# Altium PCB PCB.PcbDoc (part 2 of 3)
Units mm, origin at the board's own origin, x right, y up, seen from the top; angles counter-clockwise.
Board outline 145 x 65 mm, 4 copper layers (Top Layer, GND, VDD, Bottom Layer), stack 1.565 mm thick; 229 components, 167 nets, 739 pads, 265 vias.
Unrouted connection lines stored in the file: 1.
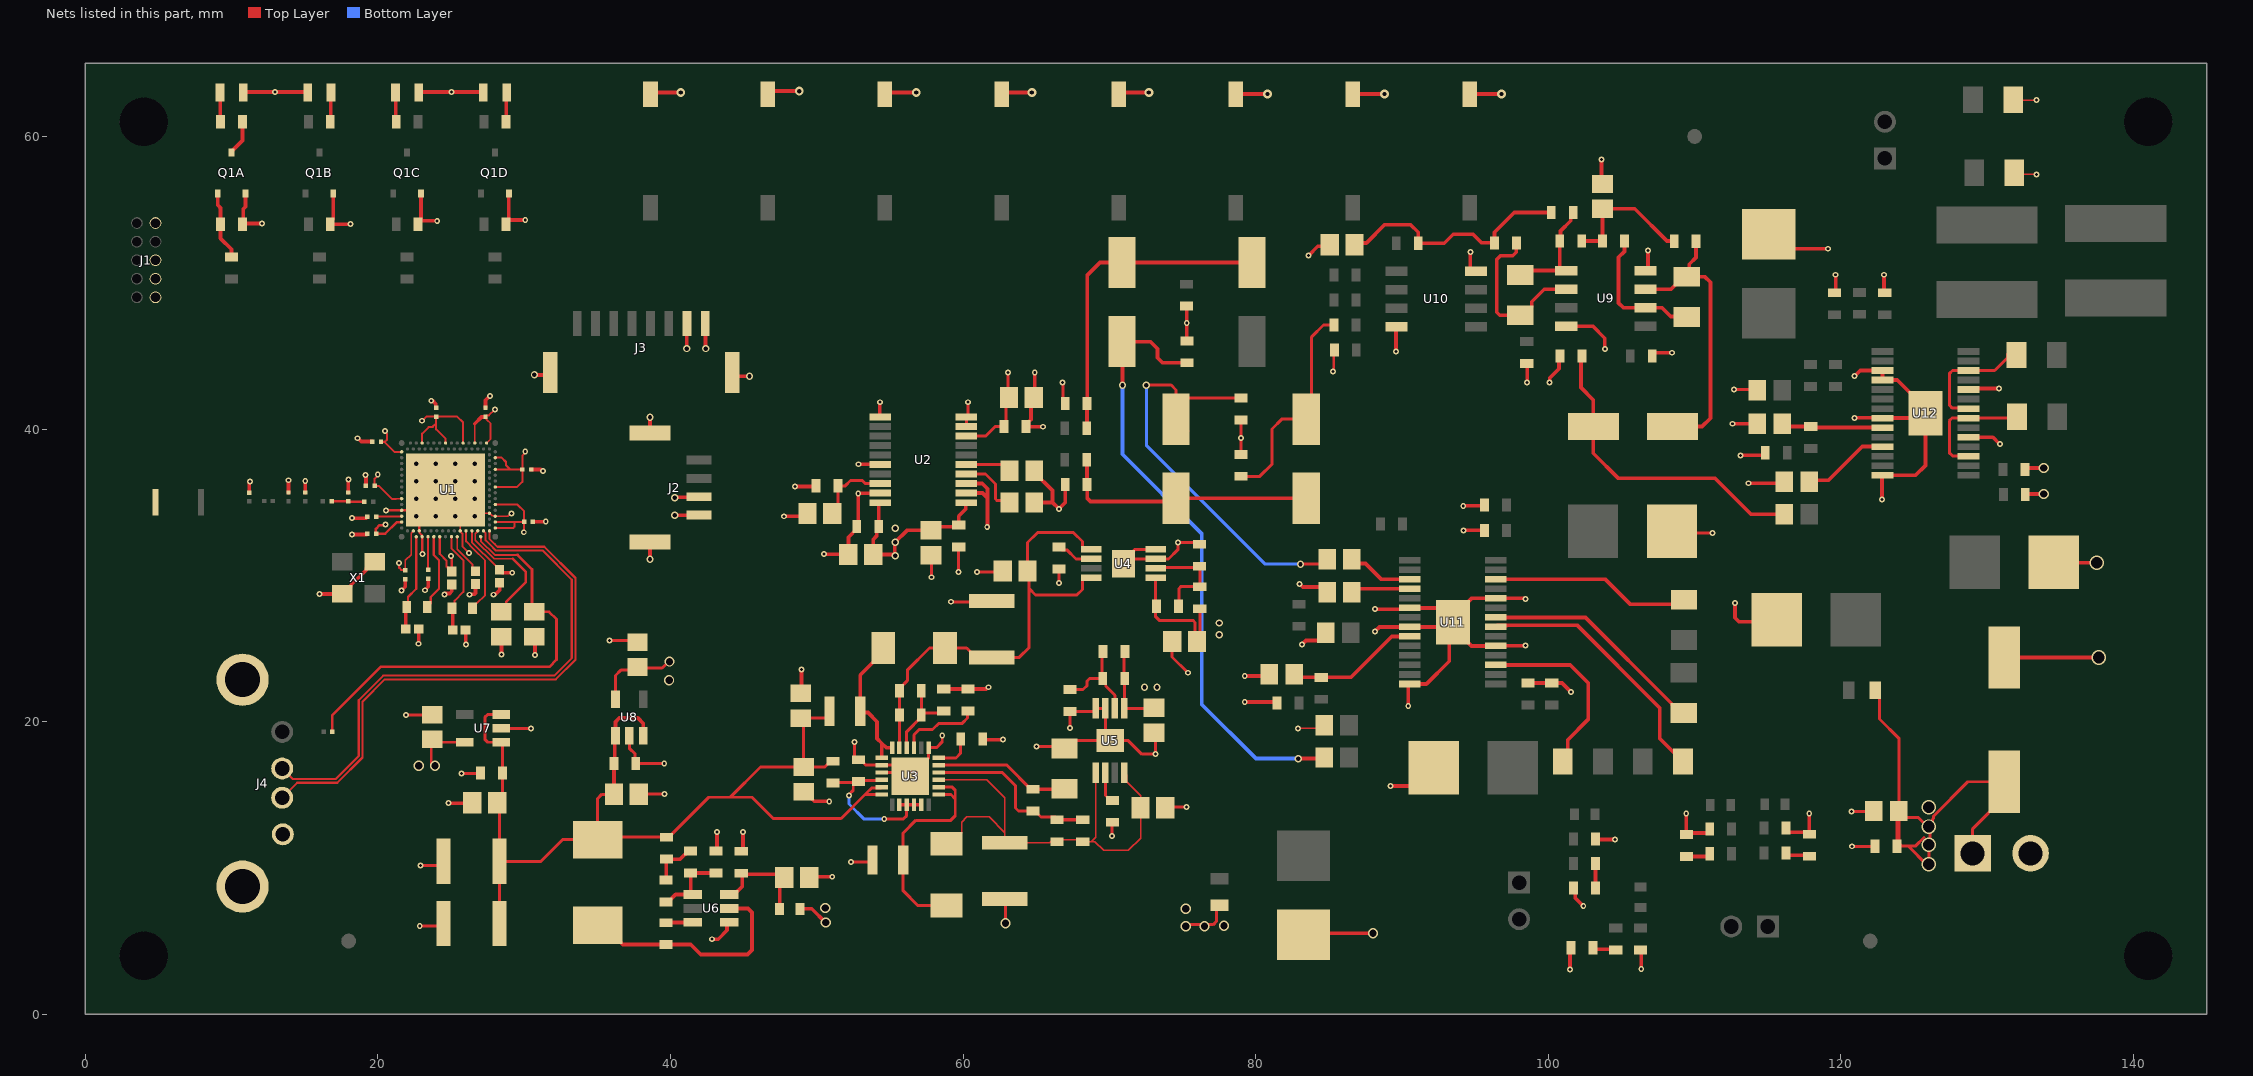
[diagram p4: the nets of this part, all layers, seen from the top]

## Part data (continued)
R8: library part RESC0603_130K_THICK, "C163432, RC0603FR-07130KL, -55℃~+155℃ 100mW 130kΩ 75V Thick Film Resistor ±1% ±100ppm/℃ 0603 Chip Resistor - Surface Mount ROHS", Supplier Part Number 1=RC0603FR-07130KL, Supplier 1="element14 APAC"
R14: library part RESC0603_320K_THIN, "C20165692, RT0603BRD07320KL, -55℃~+155℃ 100mW 320kΩ 75V Thin Film Resistor ±0.1% ±25ppm/℃ 0603 Chip Resistor - Surface Mount ROHS", Supplier Part Number 1=RT0603BRD07320KL, Supplier 1="element14 APAC"
R15: library part RESC0603_324K_THIN, "C861321, RT0603BRD07324KL, -55℃~+155℃ 100mW 324kΩ 75V Thin Film Resistor ±0.1% ±25ppm/℃ 0603 Chip Resistor - Surface Mount ROHS", Supplier Part Number 1=RT0603BRD07324KL, Supplier 1=Verical
R16: library part RESC0603_49.9_THIN, "C23185, 0603WAF499JT5E, -55℃~+155℃ 100mW 49.9Ω 75V Thick Film Resistor ±1% ±100ppm/℃ 0603 Chip Resistor - Surface Mount ROHS", Supplier Part Number 1=0603WAF499JT5E, Supplier 1=TME
R18: library part REC0603_13.3K_THICK, "C185373, RC0603FR-0713K3L, -55℃~+155℃ 100mW 13.3kΩ 75V Thick Film Resistor ±1% ±100ppm/℃ 0603 Chip Resistor - Surface Mount ROHS", Supplier Part Number 1=RC0603FR-0713K3L, Supplier 1="Future Electronics"
R19 R20 R21 R24 R26 R27: library part RESC0603_11K_THIN, "C728581, RT0603BRD0711KL, -55℃~+155℃ 100mW 11kΩ 75V Thin Film Resistor ±0.1% ±25ppm/℃ 0603 Chip Resistor - Surface Mount ROHS", Supplier Part Number 1=4152637, Supplier 1="element14 APAC"
R22 R23: library part RESC0603_5.6K_THIN, "C179095, RT0603BRD075K6L, -55℃~+155℃ 100mW 5.6kΩ 75V Thin Film Resistor ±0.1% ±25ppm/℃ 0603 Chip Resistor - Surface Mount ROHS", Supplier Part Number 1=3496658, Supplier 1="element14 APAC"
R32 R35: library part RESC0603_4.7K_THIN, "C513565, RT0603BRD074K7L, -55℃~+155℃ 100mW 4.7kΩ 75V Thin Film Resistor ±0.1% ±25ppm/℃ 0603 Chip Resistor - Surface Mount ROHS", Supplier Part Number 1=RT0603BRD074K7L, Supplier 1=Avnet
R33 R34: library part RESC0603_10K_THIN, "C95204, RT0603BRD0710KL, -55℃~+155℃ 100mW 10kΩ 75V Thin Film Resistor ±0.1% ±25ppm/℃ 0603 Chip Resistor - Surface Mount ROHS", Supplier Part Number 1=RT0603BRD0710KL, Supplier 1=Avnet
R36 R37 R38 R43: library part RESC0603_68_THIN, "C861523, RT0603BRD0768RL, -55℃~+155℃ 100mW 68Ω 75V Thin Film Resistor ±0.1% ±25ppm/℃ 0603 Chip Resistor - Surface Mount ROHS", Supplier Part Number 1=ST66570258, Supplier 1=CoreStaff
R40 R45: library part RESC0603_51K_THICK, "C107231, RC0603FR-0751KL, -55℃~+155℃ 100mW 51kΩ 75V Thick Film Resistor ±1% ±100ppm/℃ 0603 Chip Resistor - Surface Mount ROHS", Supplier Part Number 1=RC0603FR-0751KL, Supplier 1="element14 APAC"
R42 R47: library part RESC0603_39K_THICK, "C163424, RC0603FR-0739KL, -55℃~+155℃ 100mW 39kΩ 75V Thick Film Resistor ±1% ±100ppm/℃ 0603 Chip Resistor - Surface Mount ROHS", Supplier Part Number 1=RC0603FR-0739KL, Supplier 1="element14 APAC"
SD1 SD2: "C86598, STPS160U, 1 Independent 1A 4uA@60V 60V 670mV@1A 75A SMB Schottky Diodes ROHS", Supplier Part Number 1=STPS160U, Supplier 1="element14 APAC"
SW1 SW2 SW3 SW4 SW5 SW6 SW7 SW8: library part SW_SMD_PUSH, "C49393629, R4A25211L, 1.8N 12V 50mA Gull Wing Rectangular Button SPST-NO Surface Mount,Vertical White SMD Pushbutton Switches ROHS"
U1: "Multi-protocol Bluetooth Low Energy, IEEE 802.15.4, ANT and 2.4GHz proprietary system-on-chip", Supplier Part Number 1=4823-NRF5340-QKAA-RCT-ND, Component Class=nRF_Devices, Footprint Doc=AQFN-98, Pad Count=98, Supplier 1=DigiKey, Supplier 2=DigiKey, Supplier Part Number 2=4823-NRF5340-QKAA-R7CT-ND
U2: "C107671, PCM5102APWR, -25℃~+85℃ 1.8V~3.3V 2 32 384kHz 500uA 50MHz Audio Decoder I2S TSSOP-20 ADCs/DACs - Special Purpose ROHS", Manufacturer_Name="Texas Instruments", Mouser Part Number=595-PCM5102APWR, Supplier Part Number 1=296-36707-1-ND, Arrow Part Number=PCM5102APWR, Arrow Price/Stock=https://www.arrow.com/en/products/pcm5102apwr/texas-instruments?utm_currency=USD&region=nac, Datasheet Link=https://componentsearchengine.com/Datasheets/2/PCM5102APWR.pdf, Height=1.2mm, Manufacturer_Part_Number=PCM5102APWR, Mouser Price/Stock=https://www.mouser.co.uk/ProductDetail/Texas-Instruments/PCM5102APWR?qs=E2%2FxqS9xjzrfECkwEYoiyg%3D%3D, Supplier 1=DigiKey
U3: "C87663, TPS65131RGER, -15V~-2V、500mV~15V -40℃~+85℃@(TA)、-40℃~+125℃@(TJ) 1.25MHz~1.5MHz 1.95A 2 2.7V~5.5V 500uA Adjustable Boost、Inverting Buck-Boost Built-in No QFN-24-EP(4x4) DC-DC Converters ROHS", Manufacturer_Name="Texas Instruments", Mouser Part Number=595-TPS65131RGER, Arrow Part Number=TPS65131RGER, Arrow Price/Stock=https://www.arrow.com/en/products/tps65131rger/texas-instruments.html?utm_currency=USD&region=nac, Datasheet Link=http://www.ti.com/general/docs/suppproductinfo.tsp?distId=10&gotoUrl=http%3A%2F%2Fwww.ti.com%2Flit%2Fgpn%2Ftps65130, Height=1mm, Manufacturer_Part_Number=TPS65131RGER, Mouser Price/Stock=https://www.mouser.co.uk/ProductDetail/Texas-Instruments/TPS65131RGER?qs=Gse6rAGbi7988IP%2FxurOIw%3D%3D, Supplier 1="Arrow Electronics", Supplier Part Number 1=TPS65131RGER
U4: "C16430, TPS7A4901DGNR,  -40℃~+125℃@(Tj) 1 1.194V~33V 15.4uVrms 150mA 260mV@(100mA) 35V 49uA 72dB@(120Hz) Adjustable Positive Under Voltage Lockout、Over Current Protection、Over Temperature Protection、Enable HVSSOP-8 Voltage Regulators - Linear, Low Drop Out (LDO) Regulators ROHS", Manufacturer_Name="Texas Instruments", Mouser Part Number=595-TPS7A4901DGNR, Arrow Part Number=TPS7A4901DGNR, Arrow Price/Stock=https://www.arrow.com/en/products/tps7a4901dgnr/texas-instruments?utm_currency=USD&region=europe, Datasheet Link=http://www.ti.com/lit/ds/sbvs121b/sbvs121b.pdf, Height=1.1mm, Manufacturer_Part_Number=TPS7A4901DGNR, Mouser Price/Stock=https://www.mouser.co.uk/ProductDetail/Texas-Instruments/TPS7A4901DGNR?qs=Ze4%2FuFuz19J1%252B3gTImnAgQ%3D%3D, Supplier 1="Arrow Electronics", Supplier Part Number 1=TPS7A4901DGNR
U5: "C33835, TPS7A3001DGNR, -40℃~+125℃@(Tj) 1 1.18V~33V 15.1uVrms 200mA 216mV@(100mA) 36V 55uA 72dB@(120Hz) Adjustable Negative Over Current Protection、Enable、Thermal Shutdown HVSSOP-8 Voltage Regulators - Linear, Low Drop Out (LDO) Regulators ROHS", Manufacturer_Name="Texas Instruments", Mouser Part Number=595-TPS7A3001DGNR, Arrow Part Number=TPS7A3001DGNR, Arrow Price/Stock=https://www.arrow.com/en/products/tps7a3001dgnr/texas-instruments?region=nac, Datasheet Link=http://www.ti.com/lit/ds/symlink/tps7a30.pdf, Height=1.1mm, Manufacturer_Part_Number=TPS7A3001DGNR, Mouser Price/Stock=https://www.mouser.co.uk/ProductDetail/Texas-Instruments/TPS7A3001DGNR?qs=Ze4%2FuFuz19IOnYFqkI4X3Q%3D%3D, Supplier 1="Arrow Electronics", Supplier Part Number 1=TPS7A3001DGNR
U6: "C191884, TPS54202DDCR, -40℃~+125℃@(TJ) 1 2A 4.5V~28V 45uA 500kHz Adjustable Buck Buck Built-in Yes SOT-23-6 DC-DC Converters ROHS", Manufacturer_Name="Texas Instruments", Mouser Part Number=595-TPS54202DDCR, Supplier Part Number 1=296-TPS54202DDCRCT-ND, Arrow Part Number=TPS54202DDCR, Arrow Price/Stock=https://www.arrow.com/en/products/tps54202ddcr/texas-instruments?utm_currency=USD&region=nac, Datasheet Link=http://www.ti.com/lit/gpn/tps54202, Height=1.1mm, Manufacturer_Part_Number=TPS54202DDCR, Mouser Price/Stock=https://www.mouser.co.uk/ProductDetail/Texas-Instruments/TPS54202DDCR?qs=uP22XH7NdCsJtN%2Fq54jCtQ%3D%3D, Supplier 1=DigiKey
U7: "C404027, TLV75533PDBVR, -40℃~+125℃@(Tj) 1 238mV@(500mA) 25uA 3.3V 46dB@(100kHz) 5.5V 500mA 71.5uVrms Fixed Over Current Protection、Thermal Shutdown、Input undervoltage protection Positive SOT-23-5 Voltage Regulators - Linear, Low Drop Out (LDO) Regulators ROHS", Manufacturer_Name="Texas Instruments", Mouser Part Number=595-TLV75533PDBVR, Supplier Part Number 1=296-50411-1-ND, Arrow Part Number=TLV75533PDBVR, Arrow Price/Stock=https://www.arrow.com/en/products/tlv75533pdbvr/texas-instruments?utm_currency=USD&region=nac, Datasheet Link=http://www.ti.com/lit/gpn/tlv755p, Height=1.45mm, Manufacturer_Part_Number=TLV75533PDBVR, Mouser Price/Stock=https://www.mouser.co.uk/ProductDetail/Texas-Instruments/TLV75533PDBVR?qs=55YtniHzbhAKEwqeO2xJXQ%3D%3D, Supplier 1=DigiKey
U8: "C2862740, TPS7A2033PDBVR, -40℃~+125℃@(Tj) 1 10uVrms 140mV@(300mA) 3.3V 300mA 65dB@(100kHz) 6V 8.5uA Fixed Over Current Protection、Enable Positive SOT-23-5 Voltage Regulators - Linear, Low Drop Out (LDO) Regulators ROHS", Manufacturer_Name="Texas Instruments", Mouser Part Number=595-TPS7A2033PDBVR, Supplier Part Number 1=296-TPS7A2033PDBVRCT-ND, Arrow Part Number=TPS7A2033PDBVR, Arrow Price/Stock=https://www.arrow.com/en/products/tps7a2033pdbvr/texas-instruments.html?utm_currency=USD&region=nac, Datasheet Link=https://www.ti.com/lit/ds/symlink/tps7a20.pdf?ts=1603960048570&ref_url=https%253A%252F%252Fwww.ti.com%252Fstore%252Fti%252Fen%252Fp%252Fproduct%252F%253Fp%253DPTPS7A2045PDQNR%2526keyMatch%253DPTPS7A2045PDQNR%2526tisearch%253DSearch-EN-everything, Height=1.45mm, Manufacturer_Part_Number=TPS7A2033PDBVR, Mouser Price/Stock=https://www.mouser.co.uk/ProductDetail/Texas-Instruments/TPS7A2033PDBVR?qs=hd1VzrDQEGjk%2FOBnRfKB4A%3D%3D, Supplier 1=DigiKey
U9 U10: "C80100, RC4580IDR, -16V~-2V、2V~16V -40℃~+85℃ 0.0005% 110dB 2-Channel 9mA SOIC-8 Audio Amplifiers ROHS", Manufacturer_Name="Texas Instruments", Mouser Part Number=595-RC4580IDR, Arrow Part Number=RC4580IDR, Arrow Price/Stock=https://www.arrow.com/en/products/rc4580idr/texas-instruments?region=nac, Datasheet Link=http://www.ti.com/lit/gpn/rc4580, Height=1.75mm, Manufacturer_Part_Number=RC4580IDR, Mouser Price/Stock=https://www.mouser.co.uk/ProductDetail/Texas-Instruments/RC4580IDR?qs=sSOk4GDDv7xt5SOlVrtkww%3D%3D, Supplier 1="Rochester Electronics", Supplier Part Number 1=RC4580IDR
U11 U12: "C475506, TPA3138D2PWPR, -10℃~+85℃ -70dB 0.04% 102dB 10W×2@6Ω、18.5W×1@4Ω 2-Channel 20mA 3.5V~14.4V Automatic mute/no-noise switch、Overvoltage protection、Digital programmable gain Class D TSSOP-28-EP Audio Amplifiers ROHS", Manufacturer_Name="Texas Instruments", Mouser Part Number=595-TPA3138D2PWPR, Supplier Part Number 1=296-51849-1-ND, Arrow Part Number=TPA3138D2PWPR, Arrow Price/Stock=null?region=nac, Datasheet Link=http://www.ti.com/lit/gpn/tpa3138d2, Height=1.2mm, Manufacturer_Part_Number=TPA3138D2PWPR, Mouser Price/Stock=https://www.mouser.co.uk/ProductDetail/Texas-Instruments/TPA3138D2PWPR?qs=fAHHVMwC%252BbipgX0F9%252BCw8A%3D%3D, Supplier 1=DigiKey
X1: library part SMD3225_4P_32MHz_OSC, "C20617581, XL2MI-111-32M, -40℃~+85℃ 10pF 32MHz 40Ω Crystal Oscillator ±10ppm ±20ppm SMD3225-4P Crystals ROHS", Supplier Part Number 1=XL2MI-111-32M, Supplier 1=UnikeyIC

## Free pads (board coordinates)
  round 3.3 hole 3.3 unplated: 1(4,4) 2(141,4) 3(4,61) 4(141,61)
  round 1.016 all layers, no hole mask+1.016: 5(122,5) 6(18,5) 7(110,60)

## Via types
v1: diameter 0.403, hole 0.2, Top Layer to Bottom Layer, 149 vias
v2: diameter 0.703, hole 0.5, Top Layer to Bottom Layer, 32 vias
v3: diameter 0.503, hole 0.3, Top Layer to Bottom Layer, 27 vias
v4: diameter 0.25, hole 0.2, Top Layer to Bottom Layer, 17 vias
v5: diameter 0.6, hole 0.3, Top Layer to Bottom Layer, 17 vias
v6: diameter 0.61, hole 0.305, Top Layer to Bottom Layer, tented both sides, 16 vias
v7: diameter 1.003, hole 0.8, Top Layer to Bottom Layer, 6 vias
v8: diameter 0.6/0.6 (per signal layer), hole 0.3, Top Layer to Bottom Layer, 1 vias

## Nets (pads, with @x,y where several pads share a name; then routed paths per layer and width w, separated by ;. In a path a pad name is that pad's centre, name@x,y a point inside that pad or via, vN(x,y) a via of type N, cw(c..) or ccw(c..) an arc to the next point about the centre after c; other vN are vias at no path point)
3.3V_nRF: C1.2 C2.2 C3.2 C4.2 C5.2 C8.2 C9.2 C10.2 C11.2 C12.2 C58.2 J1.1 J2.2 J3.2 LED1A.2 LED1B.2 LED1C.2 LED1D.2 U1.A19 U1.AC1 U1.AG1 U1.AJ31 U1.AL3 U1.AL7 U1.AL11 U1.AL17 U1.AL25 U1.B8 U1.B28 U1.C1 U1.E1 U1.E31 U1.L1 U1.N31 U1.U1 U7.5 | length 65.2
  Top Layer w0.127: C4.2@19.801,36.1 20.083,36.1 20.699,35.484 20.701,35.484 20.955,35.23 21.257,35.23 21.259,35.232 21.614,35.232 U1.N31@21.625,35.242 ; C2.2@21.875,30.342 21.875,31.019 22.276,31.42 22.276,32.867 22.425,33.016 U1.B28@22.425,33.042 ; U1.B8@26.425,33.042 26.425,32.275 28.054,30.645 28.075,30.645 28.321,30.398 C12.2@28.321,30.378 ; U1.AL7@26.625,39.042 26.625,40.366 ; C8.2@27.356,40.848 27.435,40.928 27.593,40.928 v1(27.991,41.326) ; C8.2@27.419,40.784 27.435,40.768 27.435,40.641 27.7,40.377 27.7,39.318 U1.AL3@27.425,39.042 ; v1(29.972,32.944) 29.985,32.956 29.985,33.642 C11.2@29.991,33.649
  Top Layer w0.141: C4.2@19.801,36.1 C4.2@19.782,36.119 19.782,36.602 19.99,36.81 v1(19.99,36.881) ; C5.2@20.214,39.141 20.248,39.107 20.456,39.107 21.121,38.442 U1.AJ31@21.625,38.442 ; 20.422,39.143 20.492,39.143 20.618,39.268 20.618,39.687 20.498,39.807 v1(20.498,39.878) ; v1(21.438,30.836) 21.439,30.834 21.439,30.535 21.596,30.379 21.838,30.379 C2.2@21.875,30.342 ; v1(23.012,40.564) 23.028,40.564 23.312,40.848 C9.2@23.978,40.848 C9.2@23.957,40.827 ; U1.AL25@23.025,39.042 23.025,39.688 23.469,40.132 23.749,40.132 23.749,40.174 23.983,40.408 ; v2@23.647,17.145 23.647,18.708 C58.2@23.724,18.784 23.915,18.593 U7.5@25.933,18.593 ; C9.2@23.983,40.842 23.983,40.408 ; C9.2@24.041,40.785 24.125,40.869 25.4,40.869 25.825,40.444 U1.AL11@25.825,39.042 ; U1.AL17@24.625,39.042 24.625,39.333 23.983,39.974 23.983,40.408 ; U1.C1@28.025,33.242 29.255,33.242 29.337,33.325 29.337,33.649 ; U1.E1@28.025,33.642 28.031,33.649 29.337,33.649 ; U1.L1@28.025,34.842 29.53,34.842 29.997,34.375 C11.2@29.997,33.655 29.991,33.649 29.337,33.649 ; U1.U1@28.025,36.042 29.515,36.043 29.87,36.398 C10.2@29.87,37.236 ; U1.AC1@28.025,37.242 28.028,37.239 29.029,37.239 ; U1.AG1@28.025,38.042 28.455,38.042 28.753,37.744 28.753,37.516 29.029,37.239 ; 29.337,33.655 29.337,33.649 ; v1(30.074,38.456) 30.074,38.385 29.87,38.181 C10.2@29.87,37.236 ; 29.029,37.239 29.868,37.239 C10.2@29.87,37.236
  Top Layer w0.152: U1.A19@24.225,32.642 24.225,31.813 24.225,31.472 24.692,31.004 24.692,30.601 24.781,30.512 24.814,30.512 24.981,30.345 C1.2@24.981,30.33 ; v1(24.994,31.318) 24.994,31.25 25.048,31.196 C1.2@25.048,30.258
  Top Layer w0.178: v1(20.523,33.477) 20.473,33.427 20.117,33.427 19.863,33.172 19.863,32.854 C3.2@19.875,32.842 20.498,32.842 21.298,33.642 U1.E31@21.625,33.642
  Top Layer w0.254: LED1A.2@10.8,63 10.843,63.043 v1(12.979,63.043) 15.157,63.043 LED1B.2@15.2,63 ; LED1C.2@22.8,63 22.843,63.043 v1(25.019,63.043) 27.157,63.043 LED1D.2@27.2,63 ; 26.625,40.366 27.077,40.819 C8.2@27.276,40.819 ; C12.2@28.321,30.378 28.321,30.358 28.504,30.175 28.653,30.175 v1(29.185,30.175) ; v3(40.3,35.3) 40.337,35.337 41.912,35.337 J2.2@41.95,35.375 ; v3(41.1,45.5) 41.113,45.513 41.113,47.212 J3.2@41.125,47.225
  other v2: 22.784,16.993 23.901,16.993
3.3V_PCM: C20.1 C21.1 C27.1 C28.1 C30.1 C31.1 C64.2 U2.1 U2.8 U2.20 U8.5 | length 25
  Top Layer w0.203: U8.5@36.236,21.545 36.236,23.155 36.601,23.52 37.528,23.52 C64.2@37.744,23.737 37.809,23.673 39.432,23.673 39.864,24.105 v2(39.929,24.105) ; U2.8@60.225,39.525 61.547,39.525 62.205,40.183 C20.1@62.801,40.183 62.928,40.31 62.928,42.088 63.068,42.228 v1(63.068,43.866)
  Top Layer w0.254: U2.20@54.349,34.975 54.227,34.853 C31.1@54.227,33.328 54.087,33.188 54.087,32.687 53.858,32.458 C30.1@53.858,31.423 v3@55.223,31.423 ; v3@55.23,31.415 55.291,31.415 55.334,31.459 55.334,32.245 56.163,33.074 C28.1@57.795,33.074 58.037,33.316 59.573,33.316 C27.1@59.7,33.443 59.7,34.048 60.17,34.518 60.17,34.92 U2.1@60.225,34.975
  other v2: 39.903,22.835
  other v3: 55.35,31.344 55.35,32.258 55.35,33.223
5v_TPS54202: C34.2 C38.2 C51.2 C52.2 C56.2 C57.2 C62.2 C63.2 IN1.1 IN3.2 R10.1 R16.2 U3.5 U3.6 U7.1 U7.3 U8.1 U8.3 | length 72.9
  Top Layer w0.203: C52.2@28.325,6.2 C51.2@28.325,10.432 ; U7.3@28.433,20.493 27.503,20.493 27.305,20.295 27.305,18.796 27.508,18.593 U7.1@28.433,18.593 28.512,18.514 28.512,14.812 C56.2@28.15,14.45 28.325,14.275 C51.2@28.325,10.45 C51.2@28.325,10.432 ; C62.2@36.132,15.037 35.306,15.037 35.024,14.755 IN3.2@35.024,11.936 ; IN1.1@50.865,20.716 50.865,20.495 50.617,20.247 C34.2@48.901,20.247 49.1,20.048 C38.2@49.1,16.9 ; R10.1@51.1,17.3 50.95,17.3 50.55,16.9 C38.2@49.1,16.9 ; U3.6@54.444,15.021 53.356,15.021 53.327,15.05 ; U3.5@54.444,15.521 54.396,15.473 53.75,15.473 53.327,15.05 ; C51.2@28.325,10.432 31.107,10.432 32.612,11.936 IN3.2@35.024,11.936 ; IN3.2@35.024,11.936 35.192,12.104 R16.2@39.726,12.104 39.876,12.104 42.605,14.834 44.087,14.834 ; 44.087,14.834 45.568,14.834 47.015,13.386 51.664,13.386 53.327,15.05 ; 44.087,14.834 46.153,16.9 C38.2@49.1,16.9
  Top Layer w0.254: C62.2@36.132,15.037 36.131,15.038 C63.2@36.131,17.145 36.183,17.197 36.183,18.992 U8.1@36.236,19.045 36.236,19.98 36.5,20.244 37.77,20.244 38.136,19.878 U8.3@38.136,19.045
12V: C59.1 C60.2 C61.2 FB1.1 FB3.1 FB7.1 J5.1 | length 42
  Top Layer w0.203: v2@75.362,6.121 77.089,6.121 77.318,6.35 77.318,7.253 FB3.1@77.521,7.457 ; FB7.1@122.337,22.149 122.636,21.85 122.636,20.188 123.951,18.873 C60.2@123.951,14.414 ; C60.2@123.535,14.414 C60.2@123.951,14.414 ; 125.679,12.09 125.075,11.487 124.607,11.487 ; v7@125.971,12.827 125.907,12.827 125.297,13.437 124.45,13.437 124.372,13.515 124.372,14.414 C60.2@123.951,14.414 ; J5.1@129,11 129,12.677 131.166,14.842 C59.1@131.166,15.892 128.668,15.892 126.315,13.539 126.315,13.374 126.264,13.323 126.264,13.132 126.035,12.903 126.111,12.827 126.086,12.802 126.086,11.633 126.022,11.57 126.022,10.3 125.984,10.262 125.832,10.262 124.607,11.487 ; C60.2@123.951,13.893 123.951,11.712 124.177,11.487 ; C60.2@123.951,13.893 C60.2@123.951,14.414 ; C60.2@123.951,13.893 123.826,13.768 C61.2@123.826,11.487 124.177,11.487 ; 124.177,11.487 124.607,11.487
  Top Layer w0.254: FB1.1@48.887,7.341 48.93,7.341 49.057,7.214 49.657,7.214 v2(50.602,6.269)
  other v2: 75.225,6.011 76.495,6.011 77.826,6.045 75.225,7.205 50.577,7.26
  other v7: 126,10.262 126,11.582 126,12.827 126,14.148
+5V_RC4580: C44.1 C45.1 R14.1 U4.1 U9.8 U10.8 | length 12.4
  Top Layer w0.203: U4.1@73.15,29.825 73.164,29.811 73.164,27.864 73.164,27.166 73.431,26.899 75.737,26.899 75.856,26.78 75.856,25.603 C45.1@75.983,25.476 76.175,25.668 R14.1@76.175,27.723 ; C45.1@76.017,25.058 C45.1@76.175,25.216 ; U10.8@94.666,51.023 94.889,50.8 U10.8@95.049,50.8
  Top Layer w0.254: U10.8@94.666,51.023 v1(94.666,52.095) ; U9.8@106.637,50.83 106.807,51 v1(106.807,52.197)
  other v3: 77.495,25.933 77.495,26.746
+6V: C32.2 C33.2 C48.2 R7.1 SD1.2 U3.23 U4.5 U4.8 | length 32.9
  Top Layer w0.203: U3.23@55.644,18.221 R7.1@55.644,20.462 C32.2@55.644,22.113 55.644,22.263 56.185,22.804 56.185,23.52 57.698,25.034 SD1.2@58.758,25.034 60.241,25.034 60.88,24.395 C33.2@61.955,24.395 63.841,24.395 64.516,25.07 64.516,29.083 ; C48.2@64.516,30.184 C48.2@64.4,30.3 64.4,32.244 65.075,32.918 67.539,32.918 68.152,32.305 68.152,31.898 68.275,31.775 U4.5@68.75,31.775 ; C48.2@64.875,29.825 64.561,29.825 64.516,29.87 64.516,29.083 ; U4.8@68.75,29.825 68.275,29.825 68.152,29.702 68.152,29.036 67.767,28.651 64.948,28.651 64.516,29.083
-5V_RC4580: C46.1 C47.1 R15.1 U5.1 U9.4 U10.4 | length 11.4
  Top Layer w0.203: R15.1@70.95,24.8 71,24.75 71,22.975 71.038,22.938 71.038,20.912 U5.1@71.025,20.9 73,20.9 C47.1@73.05,20.95 ; U10.4@89.586,46.951 U10.4@89.625,46.99
  Top Layer w0.254: v1(89.586,45.288) U10.4@89.586,46.951 ; U9.4@101.213,47.02 103.043,47.02 103.861,46.203 v1(103.861,45.466)
  other v3: 72.4,22.352 73.254,22.352
-6V: C40.1 C41.2 C49.2 R11.1 SD2.1 U3.15 U5.5 U5.8 | length 33.4
  Top Layer w0.102: U3.15@58.344,16.021 61.627,16.021 62.85,14.798 62.85,12.41 ; SD2.1@58.85,11.66 59.13,11.66 59.889,12.419 59.889,13.128 60.249,13.487 61.773,13.487 62.85,12.41 ; C40.1@68.174,11.798 68.77,11.798 ; C40.1@68.174,11.939 66.129,11.939 65.915,11.725 C41.2@62.85,11.725 62.85,12.41 ; U5.5@69.075,16.5 69.075,12.103 68.77,11.798 ; U5.8@71.025,16.5 71.199,16.326 71.199,15.851 71.225,15.851 72.124,14.952 C49.2@72.124,14.122 72.124,12.746 72.132,12.738 72.132,12.036 71.298,11.201 69.596,11.201 69,11.798 68.77,11.798
D_N: J4.2 U1.B4 | length 38.8
  Top Layer w0.141: J4.2@13.46,16.8 14.182,16.078 14.483,16.078 17.12,16.078 18.693,17.652 18.693,21.467 20.367,23.14 32.051,23.14 33.25,24.34 33.25,29.712 31.263,31.698 28.063,31.698 27.633,32.128 27.37,32.392 27.37,32.874 27.225,33.019 U1.B4@27.225,33.042
D_P: J4.3 U1.B2 | length 39.3
  Top Layer w0.141: J4.3@13.46,14.8 14.483,15.823 17.225,15.823 18.948,17.546 18.948,21.361 20.472,22.885 32.156,22.885 33.505,24.234 33.505,29.817 31.369,31.953 28.169,31.953 27.986,32.136 27.813,32.309 27.625,32.497 U1.B2@27.625,33.042
GND: C1.1 C2.1 C3.1 C4.1 C5.1 C6.1 C7.1 C8.1 C9.1 C10.1 C11.1 C12.1 C13.1 C14.2 C15.2 C16.1 C17.1 C18.1 C19.1 C20.2 C21.2 C22.1 C23.1 C24.1 C25.1 C26.1 C27.2 C28.2 C29.1 C30.2 C31.2 C33.1 C34.1 C35.1 C36.1 C37.1 C38.1 C39.1 C41.1 C42.1 C43.1 C45.2 C47.2 C48.1 C49.1 C51.1 C52.1 C53.1 C54.1 C56.1 C57.1 C58.1 C59.2 C60.1 C61.1 C62.1 C63.1 C64.1 C68.1 C69.2 C74.2 C75.1 C76.1 C77.1 C79.2 C80.2 C81.1 C82.1 C85.1 C87.1 C91.1 C92.1 C94.1 C96.1 C98.1 C99.2 C100.1 C101.1 C102.2 C103.1 C104.2 C105.1 C106.1 C108.1 C110.1 C111.1 C113.1 IN2.2 J1.3 J1.5 J1.9 J2.1 J2.5 J2.6 J3.1 J3.9 J3.10 J4.4 J4.5 J4.6 J5.2 L6.1 L7.1 Q1A.2 Q1B.2 Q1C.2 Q1D.2 R4A.2 R4B.2 R4C.2 R4D.2 R8.2 R12.2 R13.2 R18.1 R25.1 R26.1 R27.1 R28.1 R29.1 R30.1 R31.1 R35.1 R36.1 R37.1 R38.1 R42.1 R43.1 R47.1 SW1.2 SW2.2 SW3.2 SW4.2 SW5.2 SW6.2 SW7.2 SW8.2 U1.104 U1.A25 U1.B12 U1.B26 U1.G1 U1.H2 U1.J31 U2.2 U2.3 U2.9 U2.10 U2.11 U2.16 U2.19 U3.2 U3.3 U3.19 U3.25 U4.3 U4.4 U4.9 U5.3 U5.4 U5.9 U6.1 U7.2 U8.2 U11.6 U11.8 U11.14 U11.19 U11.24 U11.29 U12.3 U12.4 U12.8 U12.14 U12.19 U12.24 U12.29 X1.2 X1.4 | length 342
  Top Layer w0.089: C13.1@25.992,26.264 C13.1@26.018,26.289 ; C17.1@28.423,25.808 C17.1@28.448,25.783 ; C16.1@30.683,25.808 C16.1@30.734,25.757
  Top Layer w0.102: v6(26.625,34.042) 26.825,34.242 U1.H2@27.625,34.242 27.646,34.242 27.823,34.066 28.001,34.066 U1.G1@28.025,34.042 28.881,34.042 29.052,34.214 v1(29.134,34.214) ; C98.1@80.814,23.114 C98.1@80.925,23.225 ; R42.1@81.389,21.336 R42.1@81.45,21.275 ; v1(82.88,19.533) 84.458,19.533 C94.1@84.675,19.75 ; R26.1@98.525,44.475 R26.1@98.552,44.448 ; R27.1@107.125,45.075 R27.1@107.262,45.212 ; C113.1@114.439,40.361 C113.1@114.45,40.35 ; R47.1@114.827,38.202 R47.1@115,38.375 ; C111.1@116.022,36.297 C111.1@116.125,36.4 ; C110.1@131.775,62.5 131.791,62.484 v1(133.35,62.484) ; C103.1@131.85,57.525 131.971,57.404 v1(133.35,57.404) ; C100.1@132.6,35.525 C100.1@132.635,35.56
  Top Layer w0.127: C5.1@19.614,39.141 C5.1@19.624,39.152 ; v6(25.291,34.042) 25.625,33.709 U1.B12@25.625,33.042 25.625,33.007 25.781,32.851 25.781,31.979 v1(26.238,31.521)
  Top Layer w0.152: v1(20.549,34.442) U1.J31@21.625,34.442 22.225,34.442 v6(22.625,34.042) 22.825,33.842 U1.B26@22.825,33.042 22.843,33.023 22.843,32.91 23.006,32.747 23.006,32.661 U1.A25@23.025,32.642 23.025,31.484 v1(23.038,31.471)
  Top Layer w0.203: v1(21.92,20.447) 23.686,20.447 C58.1@23.724,20.484 ; v1(22.86,6.045) 24.32,6.045 C52.1@24.475,6.2 ; v1(22.911,10.16) 24.185,10.16 C51.1@24.475,10.45 ; v1(25.705,16.459) 26.987,16.459 C57.1@27.012,16.485 ; U7.2@28.433,19.543 28.439,19.538 30.449,19.538 v1(30.455,19.533) ; v1(35.839,25.552) 37.629,25.552 C64.1@37.744,25.437 ; U8.2@37.186,19.045 37.186,18.177 37.582,17.781 37.582,17.194 C63.1@37.631,17.145 v1(39.573,17.145) ; C62.1@37.832,15.037 37.858,15.062 v1(39.599,15.062) ; C26.1@49.891,36.068 C26.1@49.945,36.122 ; v1(52.324,10.414) 53.664,10.414 IN2.2@53.8,10.55 ; v1(52.578,18.618) 52.578,17.651 52.827,17.402 C39.1@52.838,17.402 52.988,17.402 53.369,17.021 U3.2@54.444,17.021 55.644,17.021 U3.25@56.144,16.521 ; v1(52.857,37.592) v1@52.866,37.583 ; U2.16@54.341,37.583 U2.16@54.349,37.575 ; U3.3@54.444,16.521 U3.25@56.144,16.521 ; C28.2@57.795,31.374 57.836,31.333 v1(57.836,29.87) ; v1(58.572,19.05) 58.572,18.618 58.175,18.221 U3.19@57.644,18.221 57.644,17.521 U3.25@56.394,16.271 U3.25@56.144,16.521 ; v1(59.182,28.194) 61.904,28.194 C33.1@61.955,28.245 ; v1(59.69,30.226) 59.69,31.933 C27.2@59.7,31.943 ; U2.9@60.225,40.175 U2.10@60.225,40.825 60.325,40.925 v1(60.325,41.834) ; v1(60.96,30.226) 62.626,30.226 C48.1@62.7,30.3 ; C41.1@61.773,7.502 62.146,7.875 C41.1@62.85,7.875 63.254,7.875 62.89,7.512 v2(62.89,6.223) ; v1(65.024,18.288) 66.804,18.288 C37.1@66.933,18.159 67.474,18.7 U5.9@70.05,18.7 ; v1(66.548,29.489) C42.1@66.548,30.441 ; v1(66.802,43.18) 66.84,43.142 66.84,41.885 C22.1@66.975,41.75 ; v1(67.31,19.558) 67.31,20.69 R13.2@67.3,20.7 68.952,20.7 69.075,20.823 U5.4@69.075,20.9 U5.3@69.725,20.9 69.725,19.025 U5.9@70.05,18.7 ; v1(70.18,12.192) 70.18,12.92 70.425,13.165 C43.1@70.434,13.165 ; C47.2@73.05,19.25 73.152,19.148 v1(73.152,17.78) 72.212,17.78 71.292,18.7 U5.9@70.05,18.7 ; U4.4@73.15,31.775 71.765,31.775 70.95,30.96 U4.9@70.95,30.8 71.275,31.125 U4.3@73.15,31.125 73.16,31.115 74.041,31.115 74.676,31.75 v1(74.676,32.233) 76.042,32.233 R12.2@76.15,32.125 ; C49.1@74.245,14.178 74.25,14.173 v1(75.26,14.173) ; C45.2@74.283,25.476 74.283,24.421 v1(75.362,23.343) ; R30.1@75.275,48.4 R30.1@75.286,48.389 ; R31.1@75.286,46.039 R31.1@75.3,46.025 ; R29.1@78.994,38.266 v1(78.994,39.395) 78.994,40.619 R28.1@79,40.625 ; v1(85.293,43.942) 85.331,43.98 85.331,45.356 R35.1@85.375,45.4 ; C80.2@108.45,33 108.557,32.893 v1(111.227,32.893) ; v1(112.674,42.697) 114.378,42.697 C108.1@114.429,42.647 ; v1(120.726,13.868) 122.226,13.868 C60.1@122.251,13.893 ; v1(120.752,11.481) 122.32,11.481 C61.1@122.326,11.487 ; C59.2@131.166,24.392 C59.2@131.174,24.384
  Top Layer w0.254: R4A.2@10.75,54 R4A.2@10.795,54.045 ; Q1A.2@10.95,56.1 10.95,55.197 10.795,55.042 R4A.2@10.795,54.045 ; L7.1@11.201,35.657 11.201,36.332 11.252,36.383 v1(11.252,36.424) ; v1(12.09,54.051) 10.801,54.051 R4A.2@10.795,54.045 ; L6.1@13.894,35.662 v1(13.894,36.5) ; C15.2@15.037,35.662 v1(15.037,36.449) ; v1(16.002,28.727) 17.56,28.727 X1.4@17.575,28.742 17.675,28.742 18.148,29.215 18.148,29.315 19.119,30.287 19.202,30.369 19.202,30.469 19.675,30.942 X1.2@19.775,30.942 ; Q1B.2@16.95,56.1 16.95,54.35 16.75,54.15 R4B.2@16.75,54 v1(18.136,54) ; C14.2@17.983,35.662 v1(17.983,36.551) ; v1(18.237,32.791) 19.224,32.791 C3.1@19.275,32.842 ; v1(18.237,33.909) 19.182,33.909 C6.1@19.283,34.011 ; v1(18.593,39.37) 18.633,39.37 18.862,39.141 C5.1@19.614,39.141 C5.1@19.624,39.152 ; v1(19.152,36.855) 19.152,36.815 19.182,36.785 C4.1@19.182,36.119 ; v1(21.615,28.956) 21.875,29.215 C2.1@21.875,29.742 ; v1(22.784,25.324) 22.788,25.328 22.788,26.336 C7.1@22.792,26.34 ; Q1C.2@22.95,56.1 22.95,54.35 22.75,54.15 R4C.2@22.75,54 22.979,54.229 v1(24.054,54.229) ; v1(23.216,28.981) 23.216,28.998 23.444,29.226 C18.1@23.444,29.774 ; v1(23.647,41.935) 23.676,41.907 23.76,41.907 23.955,41.712 23.955,41.471 C9.1@23.978,41.448 ; v1(24.562,28.702) 24.617,28.758 24.897,28.758 25.048,28.908 C1.1@25.048,29.378 ; v1(24.816,14.427) 26.427,14.427 C56.1@26.45,14.45 ; C13.1@26.018,26.289 26.014,26.285 26.014,25.294 v1(26.035,25.273) ; v1(26.264,28.677) 26.294,28.707 26.599,28.707 26.67,28.778 C19.1@26.67,29.405 ; C8.1@27.356,41.448 27.356,41.961 v1(27.661,42.266) ; v1(27.889,28.677) 27.949,28.737 28.076,28.737 28.321,28.982 C12.1@28.321,29.498 ; v1(28.448,24.587) C17.1@28.448,25.783 ; R4D.2@28.75,54 R4D.2@28.75,54.031 ; Q1D.2@28.95,56.1 28.95,54.35 28.75,54.15 R4D.2@28.75,54.031 ; v1(30.074,54.28) 28.999,54.28 R4D.2@28.75,54.031 ; C10.1@30.47,37.236 31.11,37.236 31.211,37.135 v1(31.293,37.135) ; C11.1@30.597,33.655 30.61,33.668 31.458,33.668 v1(31.471,33.68) ; v3(30.7,43.7) 31.6,43.7 J3.10@31.775,43.875 ; v1(30.734,24.562) C16.1@30.734,25.757 ; v3(38.6,31.1) J2.6@38.6,32.275 ; J2.5@38.6,39.725 v3(38.6,40.8) ; SW1.2@38.636,62.875 38.761,63 v5(40.7,63) ; v3(40.3,34.1) 40.313,34.112 41.937,34.112 J2.1@41.95,34.125 ; J3.1@42.375,47.225 42.387,47.212 42.387,45.512 v3(42.4,45.5) ; v1(42.824,5.131) 43.256,5.131 43.866,5.74 43.866,6.128 U6.1@44.021,6.283 ; R18.1@43.15,11.2 43.18,11.23 v1(43.18,12.446) ; J3.9@44.225,43.875 44.5,43.6 v3(45.4,43.6) ; C54.1@44.9,11.25 44.958,11.308 v1(44.958,12.446) ; SW2.2@46.636,62.875 46.861,63.1 v5(48.8,63.1) ; v1(47.752,34.036) 49.183,34.036 C25.1@49.364,34.217 ; v1(48.514,36.068) C26.1@49.891,36.068 ; C34.1@48.901,21.947 48.946,21.992 v1(48.946,23.571) ; C38.1@49.1,15.2 49.2,15.2 49.673,14.727 49.673,14.703 49.822,14.554 v1(50.851,14.554) ; C53.1@49.473,9.341 49.53,9.398 v1(51.054,9.398) ; v1(50.495,31.445) 52.136,31.445 C30.2@52.158,31.423 52.158,32.609 52.727,33.178 C31.2@52.727,33.328 52.832,33.433 v1(52.832,35.585) 52.852,35.605 54.329,35.605 U2.19@54.349,35.625 ; v1@52.866,37.583 U2.16@54.341,37.583 ; v1(54.305,41.834) 54.305,40.869 U2.11@54.349,40.825 ; SW3.2@54.636,62.875 54.761,63 v5(56.8,63) ; R8.2@58.68,22.228 C36.1@60.331,22.228 61.558,22.228 61.682,22.352 v1(61.722,22.352) ; U2.2@60.225,35.625 61.327,35.625 61.671,35.281 ; U2.3@60.225,36.275 61.312,36.275 61.671,35.916 61.671,35.281 ; C35.1@61.335,18.811 61.375,18.771 v1(62.738,18.771) ; v1(61.646,33.299) 61.671,33.325 61.671,35.281 ; SW4.2@62.636,62.875 62.761,63 v5(64.7,63) ; C20.2@64.301,40.183 C20.2@64.479,40.361 ; C23.1@64.868,34.979 66.113,34.979 ; C24.1@64.868,37.138 64.868,37.038 66.113,35.793 66.113,34.979 ; v1(64.897,43.866) 64.897,42.228 C21.2@64.833,42.164 64.643,41.974 64.643,40.65 64.524,40.531 64.499,40.531 64.479,40.511 C20.2@64.479,40.361 ; v1(65.456,40.157) 64.499,40.157 64.479,40.178 C20.2@64.479,40.361 ; C29.1@66.975,36.2 66.975,34.971 v1(66.548,34.544) 66.113,34.979 ; SW5.2@70.636,62.875 70.761,63 v5(72.7,63) ; R31.1@75.286,46.039 v1(75.286,47.244) R30.1@75.286,48.389 ; SW6.2@78.636,62.875 78.661,62.9 v5(80.8,62.9) ; v1(79.248,21.336) R42.1@81.389,21.336 ; v1(79.248,23.114) C98.1@80.814,23.114 ; v1(82.982,29.413) 82.992,29.413 83.205,29.2 84.535,29.2 C91.1@84.876,28.859 ; v1(83.16,25.273) 83.433,25.546 84.326,25.546 84.799,26.019 C87.1@84.799,26.06 ; C79.2@83.261,5.428 83.37,5.537 v2(88.011,5.537) ; v1(83.617,51.867) 84.239,52.489 84.939,52.489 C68.1@85.05,52.6 ; SW7.2@86.636,62.875 86.661,62.9 v5(88.8,62.9) ; v1(88.138,26.162) 88.451,26.475 U11.8@90.537,26.475 93.15,26.475 U11.29@93.218,26.543 ; v1(88.138,27.686) 90.448,27.686 U11.6@90.537,27.775 92.5,27.775 U11.29@93.475,26.8 ; v1(89.205,15.596) 90.896,15.596 C74.2@92.15,16.85 ; v1(90.424,21.082) 90.424,22.462 U11.14@90.537,22.575 91.663,22.575 93.218,24.13 U11.29@93.218,26.543 ; v1(94.183,34.747) 95.592,34.747 C81.1@95.643,34.798 ; v1(94.207,33.074) 95.64,33.074 C82.1@95.643,33.071 ; SW8.2@94.636,62.875 94.661,62.9 v5(96.8,62.9) ; v1(98.425,25.197) 96.435,25.197 U11.19@96.413,25.175 94.75,25.175 93.475,26.45 U11.29@93.475,26.8 ; v1(98.45,28.372) 98.41,28.372 98.357,28.425 U11.24@96.413,28.425 94.75,28.425 93.475,27.15 U11.29@93.475,26.8 ; v1(98.552,43.18) R26.1@98.552,44.448 ; C76.1@98.603,22.645 C75.1@100.228,22.645 100.926,22.645 v1(101.549,22.022) ; v1(100.076,43.18) 100.09,43.194 100.09,43.482 100.723,44.115 R25.1@100.723,44.831 ; v1(101.473,3.073) 101.473,4.473 R38.1@101.55,4.55 ; R43.1@101.725,8.625 101.83,8.52 101.83,7.949 102.041,7.738 v1(102.387,7.391) ; C96.1@103.225,11.975 103.262,11.938 v1(104.546,11.938) ; v1(103.632,58.42) 103.632,56.818 C69.2@103.7,56.75 ; C92.1@106.3,4.4 106.35,4.35 v1(106.35,3.099) ; R27.1@107.262,45.212 v1(108.458,45.212) ; v1(109.423,13.716) 109.423,12.307 R37.1@109.449,12.282 109.562,12.395 110.85,12.395 111.023,12.568 C85.1@111.023,12.672 ; v1(112.598,40.361) C113.1@114.288,40.361 C113.1@114.439,40.361 ; v1(112.751,28.118) 112.751,27.102 113.03,26.822 115.461,26.822 C102.2@115.613,26.975 ; v1(113.132,38.202) R47.1@114.827,38.202 ; v1(113.69,36.297) C111.1@116.022,36.297 ; C104.2@115.05,53.3 116.026,52.324 v1(119.126,52.324) ; C77.1@116.233,12.722 116.233,12.623 116.406,12.45 117.713,12.45 R36.1@117.856,12.307 117.831,12.332 v1(117.831,13.716) ; C105.1@119.558,49.315 119.634,49.391 v1(119.634,50.546) ; v1(120.929,40.767) 122.82,40.767 U12.8@122.837,40.75 125.45,40.75 U12.29@125.775,41.075 ; v1(120.929,43.612) 121.318,44 U12.3@122.837,44 U12.4@122.837,43.35 123.85,43.35 125.775,41.425 U12.29@125.775,41.075 ; v1(122.809,35.179) 122.809,36.822 U12.14@122.837,36.85 125.115,36.85 125.775,37.51 U12.29@125.775,41.075 ; v1(122.936,50.546) 122.936,49.366 C106.1@122.987,49.315 ; U12.19@128.713,39.443 130.381,39.443 v1@130.857,38.967 ; U12.24@128.713,42.7 128.787,42.774 v1(130.81,42.774) ; C59.2@131.174,24.384 v7(137.617,24.384) ; C101.1@132.575,37.225 132.686,37.336 133.856,37.336 v2(133.858,37.338) ; C100.1@132.635,35.56 v2(133.858,35.56) ; C99.2@134.551,30.886 134.577,30.861 v7(137.49,30.861) ; U11.29@93.218,26.543 U11.29@93.475,26.8
  other v1: 130.861,38.964
  other v6: 23.958,34.042 22.625,35.242 23.958,35.242 25.291,35.242 26.625,35.242 22.625,36.442 23.958,36.442 25.291,36.442 26.625,36.442 22.625,37.642 23.958,37.642 25.291,37.642 26.625,37.642
LEFT_AF: C71.2 R29.2 R33.1 | length 15.1
  Top Layer w0.203: R29.2@78.994,36.766 80.276,36.766 81.102,37.592 81.102,40.005 81.772,40.675 C71.2@83.45,40.675 83.82,41.045 83.82,46.304 84.633,47.117 R33.1@85.356,47.117
LINN: C91.2 U11.4 | length 4.1
  Top Layer w0.254: C91.2@86.576,28.859 86.792,29.075 U11.4@90.537,29.075
LINP: C89.2 U11.3 | length 4.5
  Top Layer w0.254: C89.2@86.576,31.084 86.85,30.81 87.503,30.81 88.588,29.725 U11.3@90.537,29.725
LP_OUT: C66.1 C67.1 R20.2 U9.7 | length 19.8
  Top Layer w0.254: U9.7@106.637,49.56 108.385,49.56 109.225,50.4 C66.1@109.45,50.4 ; C67.1@108.475,40.175 110.508,40.175 111.074,40.742 111.074,50.038 110.712,50.4 C66.1@109.45,50.4 ; R20.2@110.097,52.832 110.097,51.728 109.63,51.261 109.63,50.58 C66.1@109.45,50.4
Mech_ANT: ANT1.2
NetC6_2: C6.2 C7.2 L1.1 U1.A27 U1.G31 | length 8.4
  Top Layer w0.141: C6.2@19.883,34.011 19.899,34.026 21.609,34.026 U1.G31@21.625,34.042
  Top Layer w0.152: L1.1@21.912,27.78 L1.1@21.975,27.842 22.059,27.927 22.059,28.524 22.625,29.09 U1.A27@22.625,32.642
  Top Layer w0.254: C7.2@21.912,26.34 L1.1@21.912,27.78
NetC13_2: C13.2 L2.1 U1.A15 | length 7.1
  Top Layer w0.127: U1.A15@25.025,32.642 25.025,31.846 25.057,31.813 25.844,31.026 25.844,28.867 25.248,28.27 25.248,27.915 L2.1@25.075,27.742 L2.1@25.112,27.704
  Top Layer w0.254: C13.2@25.112,26.264 L2.1@25.112,27.704
NetC14_1: C14.1 L3.2 L4.1 | length 2.3
  Top Layer w0.17: L4.1@16.835,35.052 16.84,35.057 17.988,35.057 18.001,35.044 19.063,35.044 L3.2@19.08,35.027
NetC16_2: C16.2 R1.1 U1.A5 | length 30.1
  Top Layer w0.127: U1.A5@27.025,32.642 27.043,32.623 27.043,32.342 27.991,31.394 29.54,31.394
  Top Layer w0.178: R1.1@16.891,19.304 16.891,20.447 20.193,23.749 31.725,23.749 32.207,24.232 32.207,27.008 31.707,27.508 C16.2@30.683,27.508 30.531,27.661 30.531,30.404 29.54,31.394
NetC17_2: C17.2 U1.B6 | length 8.5
  Top Layer w0.102: U1.B6@26.825,33.042 26.825,33.009 26.67,32.854 26.67,32.41 27.94,31.14 29.21,31.14 ; C17.2@28.423,27.508 C17.2@28.785,27.871
  Top Layer w0.178: C17.2@28.785,27.871 28.785,28.201 30.099,29.515 30.099,30.251 29.21,31.14
NetC18_2: C18.2 U1.A23 | length 2.3
  Top Layer w0.127: C18.2@23.434,30.383 U1.A23@23.434,32.632
  Top Layer w0.141: U1.A23@23.425,32.642 U1.A23@23.434,32.632 ; C18.2@23.434,30.383 C18.2@23.444,30.374
NetC19_2: C19.2 U1.A13 | length 2.9
  Top Layer w0.127: U1.A13@25.425,32.642 25.425,31.775 26.47,30.731 26.47,30.485 C19.2@26.67,30.285
NetC22_2: C22.2 C72.1 C73.1 R5.2 | length 22.1
  Top Layer w0.254: R5.2@68.451,40.059 68.463,40.071 68.463,41.738 C22.2@68.475,41.75 68.475,50.492 69.358,51.375 C73.1@70.85,51.375 C72.1@79.75,51.375
NetC23_2: C23.2 U2.4 | length 4.3
  Top Layer w0.203: U2.4@60.225,36.925 61.525,36.925 62.205,36.246 62.205,35.222 62.324,35.103 63.044,35.103 C23.2@63.168,34.979
NetC24_2: C24.2 U2.5 | length 3.1
  Top Layer w0.203: U2.5@60.225,37.575 62.731,37.575 C24.2@63.168,37.138
NetC25_2: C25.2 C26.2 U2.18 | length 5.2
  Top Layer w0.203: C25.2@51.064,34.217 51.445,34.598 C26.2@51.445,36.122 51.946,36.122 52.299,36.474 53.111,36.474 53.311,36.275 U2.18@54.349,36.275
NetC29_2: C29.2 C70.1 C71.1 R6.2 | length 17.8
  Top Layer w0.254: R6.2@68.451,37.9 68.463,37.888 68.463,36.212 C29.2@68.475,36.2 68.475,35.284 68.707,35.052 74.327,35.052 C70.1@74.55,35.275 C71.1@83.45,35.275
NetC32_1: C32.1 R7.2 R8.1 U3.22 | length 6
  Top Layer w0.203: U3.22@56.144,18.221 56.144,19.312 57.144,20.312 R7.2@57.144,20.462 ; C32.1@57.144,22.113 R7.2@57.144,20.462 ; R8.1@58.68,20.728 58.551,20.599 57.281,20.599 R7.2@57.144,20.462
NetC35_2: C35.2 U3.18 | length 2.6
  Top Layer w0.203: U3.18@58.344,17.521 59.507,17.521 59.835,17.849 C35.2@59.835,18.811
NetC36_2: C36.2 U3.21 | length 5.5
  Top Layer w0.203: U3.21@56.644,18.221 56.644,19.103 56.998,19.456 57.912,19.456 58.344,19.888 59.944,19.888 60.298,20.242 60.298,20.695 C36.2@60.331,20.728
NetC37_2: C37.2 R9.2 U3.17 | length 9.3
  Top Layer w0.203: U3.17@58.344,17.021 62.99,17.021 64.624,15.387 R9.2@64.774,15.387 ; C37.2@66.911,15.387 C37.2@66.933,15.409
  Top Layer w0.254: R9.2@64.774,15.387 C37.2@66.911,15.387
NetC39_2: C39.2 R10.2 U3.4 U3.8 U3.9 U3.10 U3.11 | length 11.7
  Top Layer w0.203: R10.2@51.1,15.8 51.151,15.851 C39.2@52.637,15.851 ; v1(52.197,14.961) 52.197,15.015 52.49,15.307 52.49,15.704 C39.2@52.637,15.851 ; U3.4@54.444,16.021 54.396,15.973 52.909,15.973 C39.2@52.838,15.902 52.688,15.902 C39.2@52.637,15.851 ; v1@54.686,13.36 55.931,13.36 56.144,13.574 U3.9@56.144,14.321
  Top Layer w0.254: U3.8@55.644,14.321 U3.9@56.144,14.321 U3.10@56.644,14.321 U3.11@57.144,14.321
  Bottom Layer w0.203: v1(52.197,14.961) 52.197,14.376 53.238,13.335 v1(54.61,13.335)
NetC40_2: C40.2 R9.1 R11.2 U3.16 | length 12.2
  Top Layer w0.102: C40.2@67.966,13.487 67.777,13.298 C40.2@68.174,13.298
  Top Layer w0.203: U3.16@58.344,16.521 62.676,16.521 63.576,15.621 63.576,14.097 63.786,13.887 R9.1@64.774,13.887 64.924,13.887 65.324,13.487 R11.2@66.327,13.487
  Top Layer w0.254: R11.2@66.421,13.298 C40.2@67.777,13.298
NetC42_2: C42.2 U4.6 | length 2.5
  Top Layer w0.203: C42.2@66.548,31.941 66.746,31.743 67.089,31.743 67.706,31.125 U4.6@68.75,31.125
NetC43_2: C43.2 U5.6 | length 2.2
  Top Layer w0.203: U5.6@69.725,16.5 69.725,14.949 70.056,14.618 C43.2@70.206,14.618
NetC44_2: C44.2 R12.1 R14.2 U4.2 | length 7.2
  Top Layer w0.203: U4.2@73.15,30.475 73.225,30.55 76.075,30.55 R12.1@76.15,30.625 76.175,30.6 76.175,30.55 R14.2@76.175,29.223 74.871,29.223 74.752,29.104 74.752,27.952 C44.2@74.664,27.864
NetC46_2: C46.2 R13.1 R15.2 U5.2 | length 7
  Top Layer w0.203: R13.1@67.3,22.2 68.199,22.2 68.478,22.479 68.478,22.784 68.645,22.95 C46.2@69.55,22.95 ; R15.2@69.45,24.8 69.5,24.75 69.5,23 C46.2@69.55,22.95 ; U5.2@70.375,20.9 70.375,21.802 69.748,22.428 69.748,22.752 C46.2@69.55,22.95
NetC50_1: C50.1 IN3.1 U6.2 | length 15.7
  Top Layer w0.254: IN3.1@35.024,6.086 35.449,6.086 36.597,4.938 36.597,4.911 36.746,4.762 41.39,4.762 42.062,4.089 45.263,4.089 45.568,4.394 45.568,6.96 45.294,7.233 U6.2@44.021,7.233
NetC50_2: C50.2 U6.6 | length 1.8
  Top Layer w0.254: C50.2@39.7,6.262 39.711,6.272 41.51,6.272 U6.6@41.521,6.283
NetC53_2: C53.2 C54.2 FB1.2 U6.3 | length 7.3
  Top Layer w0.254: U6.3@44.021,8.183 44.346,8.183 44.9,8.737 44.9,9.75 45.05,9.75 45.05,9.705 45.179,9.576 47.538,9.576 C53.2@47.773,9.341 47.458,9.026 FB1.2@47.458,7.391
NetC55_1: C55.1 R17.1 R18.2 U6.4 | length 5.3
  Top Layer w0.254: C55.1@39.7,7.683 39.85,7.683 40.35,8.183 U6.4@41.521,8.183 41.374,8.33 R17.1@41.374,9.658 41.377,9.661 43.101,9.661 R18.2@43.104,9.664
NetC55_2: C55.2 R16.1 R17.2 | length 3.3
  Top Layer w0.254: C55.2@39.7,9.183 39.7,10.578 R16.1@39.726,10.604 40.67,10.604 41.224,11.158 R17.2@41.374,11.158
NetC65_1: C65.1 R22.2 U9.2 | length 11.6
  Top Layer w0.254: R22.2@97.825,52.725 97.809,52.709 97.809,52.089 97.561,51.841 96.723,51.841 96.469,51.587 96.469,47.981 96.675,47.775 C65.1@98.075,47.775 98.283,47.775 98.857,48.348 98.857,48.692 99.725,49.56 U9.2@101.213,49.56
NetC65_2: C65.2 R19.2 R24.1 U9.1 | length 7.7
  Top Layer w0.254: C65.2@98.075,50.525 98.38,50.83 U9.1@100.998,50.83 ; U9.1@101.213,50.83 U9.1@100.998,50.83 ; R19.2@101.7,54.8 101.527,54.627 101.527,54.233 100.826,53.532 100.826,52.901 R24.1@100.775,52.85 100.775,51.053 U9.1@100.998,50.83
NetC66_2: C66.2 R23.2 U9.6 | length 9.4
  Top Layer w0.254: R23.2@105.2,52.85 105.2,52.139 104.8,51.74 104.8,48.616 105.126,48.29 U9.6@106.637,48.29 107.768,48.29 108.364,47.693 109.407,47.693 C66.2@109.45,47.65
NetC67_2: C67.2 C112.1 R25.2 | length 21.6
  Top Layer w0.254: R25.2@102.223,44.831 102.223,42.836 103.075,41.984 C67.2@103.075,40.175 103.075,38.352 104.8,36.627 111.404,36.627 113.856,34.175 C112.1@116.15,34.175
NetC68_2: C68.2 R19.1 R21.2 R22.1 | length 16.8
  Top Layer w0.254: C68.2@86.75,52.6 86.862,52.712 87.561,52.712 88.806,53.958 90.602,53.958 90.602,53.95 91.1,53.451 R21.2@91.1,52.7 92.883,52.7 93.497,53.315 94.844,53.315 95.428,52.73 96.32,52.73 R22.1@96.325,52.725 96.325,53.45 97.675,54.8 R19.1@100.2,54.8
NetC69_1: C69.1 R20.1 R23.1 R24.2 | length 9.4
  Top Layer w0.254: R24.2@102.275,52.85 R23.1@103.7,52.85 C69.1@103.7,55.05 105.91,55.05 108.111,52.849 108.58,52.849 R20.1@108.597,52.832
NetC70_2: C70.2 C89.1 R28.2 | length 30
  Top Layer w0.203: v3(72.517,43.002) 74.219,43.002 74.55,42.671 C70.2@74.55,41.302 ; C70.2@75.373,39.852 C70.2@74.55,40.675 C70.2@74.55,41.302 ; R28.2@79,42.125 75.373,42.125 C70.2@74.55,41.302 ; v3(83.058,30.759) 84.566,30.759 C89.1@84.8,30.525
  Bottom Layer w0.203: v3(72.517,43.002) 72.517,38.887 80.645,30.759 v3(83.058,30.759)
NetC73_2: C73.2 C95.1 R31.2 | length 42.4
  Top Layer w0.254: v3(70.891,43.002) 70.891,45.934 C73.2@70.85,45.975 72.795,45.975 73.279,45.491 73.279,44.874 73.628,44.525 R31.2@75.3,44.525 ; v3(82.906,17.475) 84.6,17.475 C95.1@84.675,17.55
  Bottom Layer w0.254: v3(70.891,43.002) 70.891,38.278 76.302,32.868 76.302,21.184 80.01,17.475 v3(82.906,17.475)
NetC78_1: C78.1 R36.2 | length 1.7
  Top Layer w0.254: C78.1@116.233,11.022 116.383,10.871 117.792,10.871 R36.2@117.856,10.807
NetC83_1: C83.1 U11.26 | length 13.7
  Top Layer w0.254: U11.26@96.413,29.725 103.904,29.725 105.613,28.016 108.963,28.016 C83.1@109.271,28.324
NetC84_1: C84.1 U11.22 | length 15.6
  Top Layer w0.254: U11.22@96.413,27.125 102.542,27.125 108.472,21.195 108.472,21.144 109.02,20.596 C84.1@109.245,20.596
NetC86_1: C86.1 R37.2 | length 1.7
  Top Layer w0.254: R37.2@109.449,10.782 110.833,10.782 C86.1@111.023,10.972
NetC88_1: C88.1 U11.21 | length 17.9
  Top Layer w0.254: U11.21@96.413,26.475 96.511,26.573 97.148,26.573 97.172,26.597 101.952,26.597 107.62,20.93 107.62,18.85 C88.1@109.198,17.272
NetC90_1: C90.1 U11.17 | length 12.9
  Top Layer w0.254: U11.17@96.413,23.875 101.499,23.875 102.718,22.657 102.718,20.142 101.321,18.745 101.321,17.606 C90.1@100.987,17.272
NetC93_1: C93.1 R38.2 | length 1.6
  Top Layer w0.254: R38.2@103.05,4.55 103.155,4.445 104.555,4.445 C93.1@104.6,4.4
NetC97_1: C97.1 R43.2 | length 1.7
  Top Layer w0.254: C97.1@103.214,10.312 103.225,10.301 R43.2@103.225,8.625
NetC98_2: C98.2 R40.2 U11.9 | length 9.2
  Top Layer w0.254: C98.2@82.625,23.225 82.825,23.025 86.5,23.025 89.3,25.825 U11.9@90.537,25.825
NetC107_1: C107.1 U12.22 U12.26 | length 8.2
  Top Layer w0.203: U12.22@128.713,41.4 128.686,41.427 127.61,41.427 127.432,41.605 127.432,43.815 127.617,44 U12.26@128.713,44 130.505,44 131.391,44.885 C107.1@131.391,45.11
NetC109_1: C109.1 U12.17 U12.21 | length 8.3
  Top Layer w0.203: U12.17@128.713,38.15 127.636,38.151 127.407,38.379 127.407,40.564 127.593,40.75 U12.21@128.713,40.75 131.933,40.75 C109.1@132.026,40.843
NetC111_2: C111.2 U12.11 | length 6
  Top Layer w0.254: C111.2@117.825,36.4 117.925,36.5 119.151,36.5 121.452,38.8 U12.11@122.837,38.8
NetC113_2: C113.2 R45.2 U12.9 | length 7
  Top Layer w0.254: C113.2@115.988,40.361 116.178,40.171 R45.2@117.932,40.171 118.003,40.1 U12.9@122.837,40.1
NetIN1_2: IN1.2 SD1.1 U3.1 U3.24 | length 9.9
  Top Layer w0.254: U3.1@54.444,17.521 54.444,18.53 ; SD1.1@54.538,25.034 54.538,24.754 52.965,23.181 IN1.2@52.965,20.716 53.056,20.625 53.492,20.625 54.121,19.997 54.121,18.854 54.444,18.53 ; U3.24@55.144,18.221 54.753,18.221 54.444,18.53
NetIN2_1: IN2.1 SD2.2 U3.13 U3.14 | length 15.6
  Top Layer w0.203: U3.13@58.344,15.021 59.172,15.021 59.461,14.732 ; U3.14@58.344,15.521 59.257,15.521 59.461,15.316 59.461,14.732 ; SD2.2@58.85,7.44 56.898,7.44 55.9,8.438 IN2.1@55.9,10.55 55.9,12.39 56.769,13.259 59.157,13.259 59.461,13.564 59.461,14.732
NetL1_2: L1.2 U1.A21 | length 5.3
  Top Layer w0.152: L1.2@23.375,27.842 23.611,28.079 23.611,28.513 24.181,29.083 24.181,31.039 23.825,31.395 23.825,31.813 U1.A21@23.825,32.642
NetL2_2: L2.2 U1.B10 | length 6.2
  Top Layer w0.127: U1.B10@26.025,33.042 26.025,32.319 26.531,31.813 27.33,31.013 27.33,28.649 26.76,28.079 26.711,28.079 26.475,27.842 L2.2@26.475,27.742
NetLED1A_1: LED1A.1 R2A.2 | length 2
  Top Layer w0.203: LED1A.1@9.2,63 LED1A.1@9.225,62.975 ; R2A.2@9.225,61.025 R2A.2@9.25,61
  Top Layer w0.254: R2A.2@9.225,61.025 LED1A.1@9.225,62.975
NetLED1B_1: LED1B.1 R2B.2 | length 2
  Top Layer w0.203: R2B.2@16.75,61 R2B.2@16.775,61.025 ; LED1B.1@16.775,62.975 LED1B.1@16.8,63
  Top Layer w0.254: R2B.2@16.775,61.025 LED1B.1@16.775,62.975
NetLED1C_1: LED1C.1 R2C.2 | length 2
  Top Layer w0.254: LED1C.1@21.2,63 21.225,62.975 21.225,61.025 R2C.2@21.25,61
NetLED1D_1: LED1D.1 R2D.2 | length 2
  Top Layer w0.254: R2D.2@28.75,61 28.775,61.025 28.775,62.975 LED1D.1@28.8,63
NetQ1A_1: Q1A.1 R3A.2 R4A.1 | length 4.7
  Top Layer w0.254: Q1A.1@9.05,56.1 9.05,55.314 9.25,55.114 R4A.1@9.25,54 9.25,53.031 10,52.281 R3A.2@10,51.75
NetQ1A_3: Q1A.3 R2A.1 | length 2.4
  Top Layer w0.254: Q1A.3@10,58.9 10,58.975 10.75,59.725 R2A.1@10.75,61

## Text inside footprints (layer, text, board x,y; h text height)
L6: Mechanical 7 "IN 0.6 mm x 0.3 mm (0201 imperial)" at 12.552,42.762 h1 r270
L7: Mechanical 7 "IN 0.6 mm x 0.3 mm (0201 imperial)" at 9.86,42.757 h1 r270
L8: Mechanical 7 "IN 6.0 mm x 6.0 mm (2424 imperial)" at 135.092,41.2 h1 r90
L9: Mechanical 7 "IN 6.0 mm x 6.0 mm (2424 imperial)" at 143.892,41.3 h1 r90
LED1A: Mechanical 7 "LED 2.0 mm x 1.25 mm (0805 imperial)" at -0.325,60.733 h1
LED1B: Mechanical 7 "LED 2.0 mm x 1.25 mm (0805 imperial)" at 26.325,65.267 h1 r180
LED1C: Mechanical 7 "LED 2.0 mm x 1.25 mm (0805 imperial)" at 11.675,60.733 h1
LED1D: Mechanical 7 "LED 2.0 mm x 1.25 mm (0805 imperial)" at 38.325,65.267 h1 r180